# Altium PCB PCB1.PcbDoc
Units mm, origin at the board's own origin, x right, y up, seen from the top; angles counter-clockwise.
Board outline 37.85 x 29.59 mm, 2 copper layers (Top Layer, Bottom Layer); 22 components, 22 nets, 111 pads, 0 vias.
Unrouted connection lines stored in the file: 49.
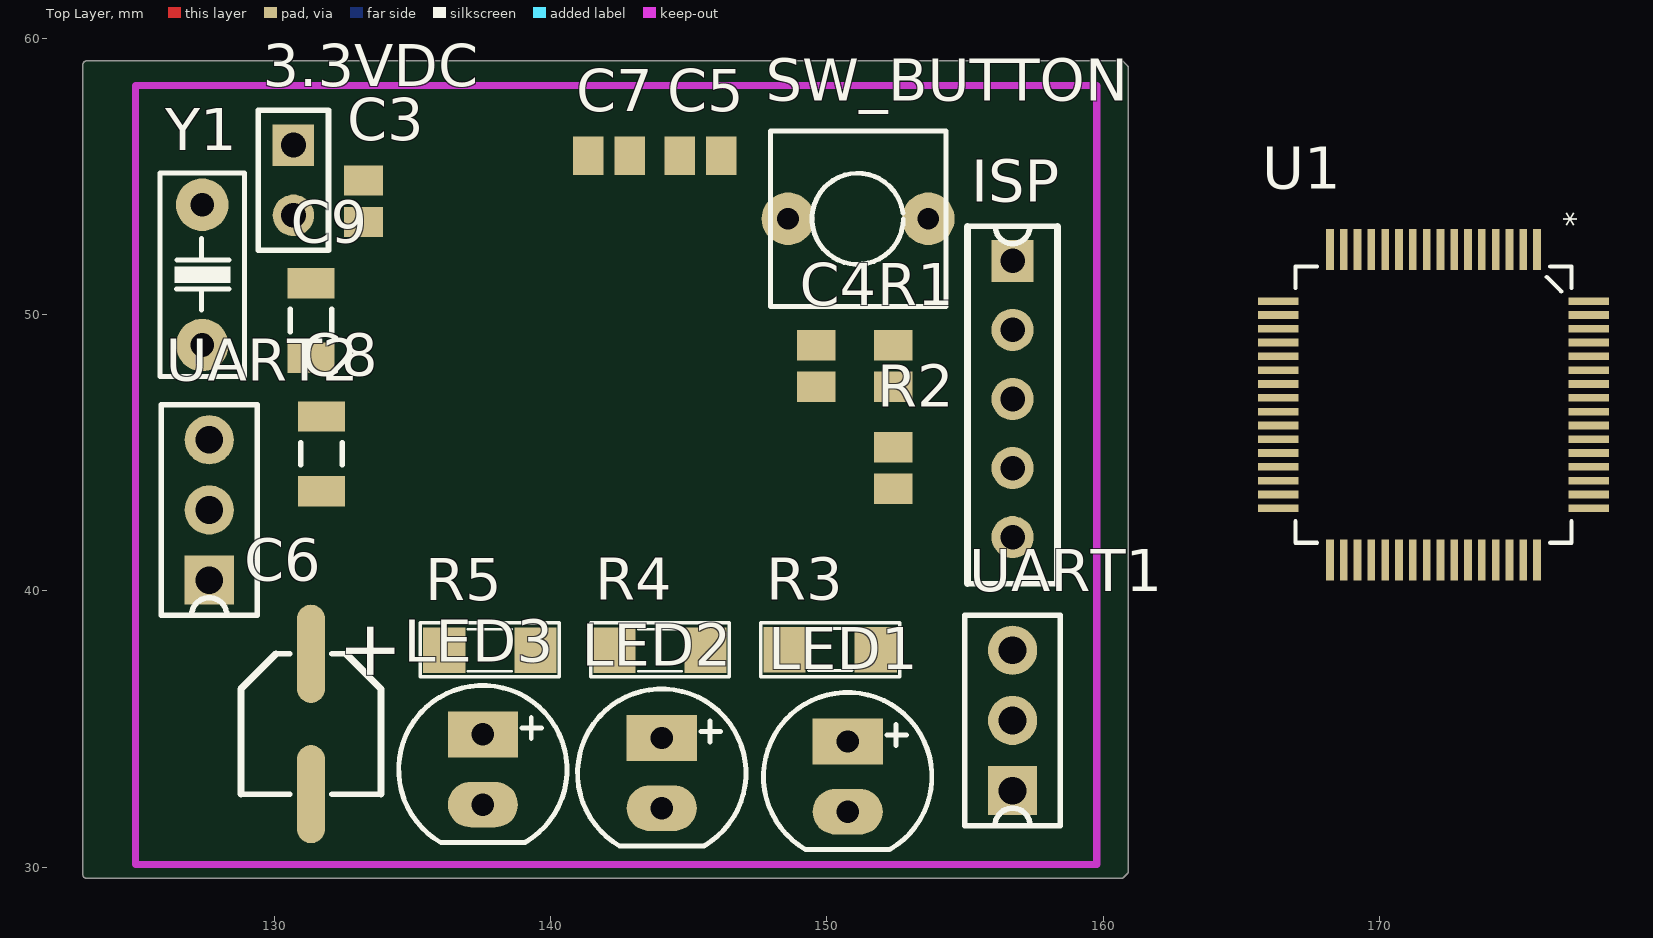
[diagram p0: Top Layer view]
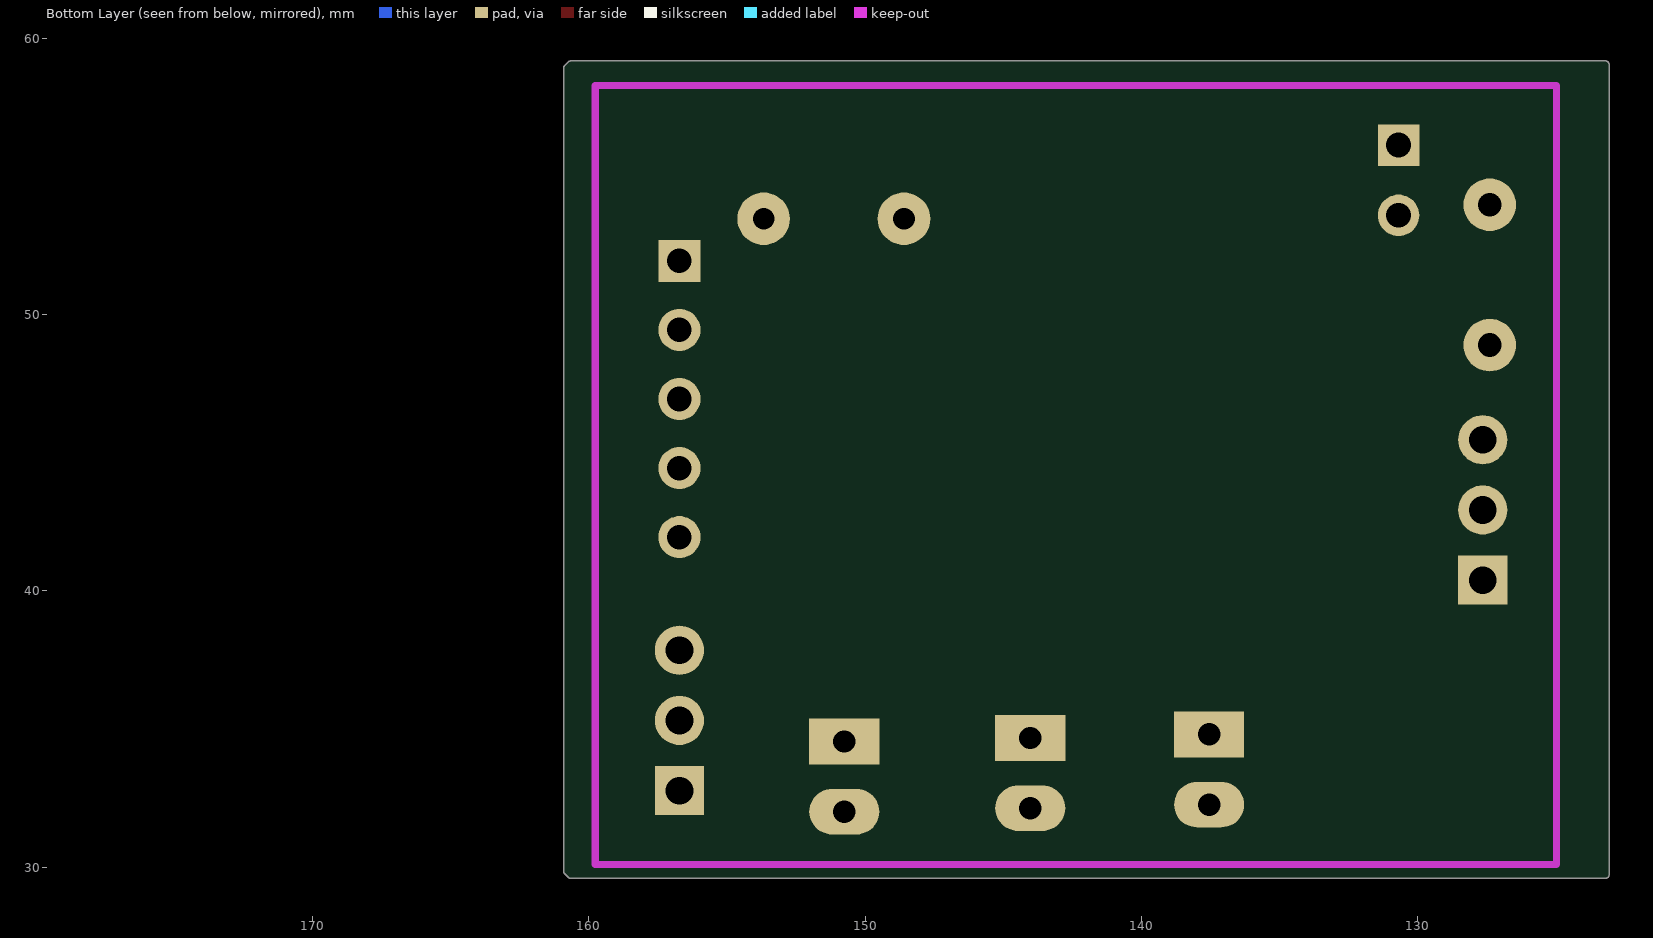
[diagram p1: Bottom Layer view, seen from below]

## Layer stack, top to bottom
Top Layer: signal copper 0.0356
Dielectric: core 0.32, FR-4, Dk 4.8
Bottom Layer: signal copper 0.0356

## Board outline
123.063,29.718 ccw(c123.19,29.718) 123.19,29.591 160.655,29.591 ccw(c160.655,29.718) 160.746,29.628 160.745,29.628 160.872,29.755 160.872,29.754 ccw(c160.782,29.845) 160.909,29.845 160.909,58.928 ccw(c160.782,58.928) 160.872,59.019 160.872,59.018 160.745,59.145 160.746,59.145 ccw(c160.655,59.055) 160.655,59.182 123.19,59.182 ccw(c123.19,59.055) 123.063,59.055

## Design rules (kind name [scope] priority, off if disabled: settings)
Clearance 3.3VCC [InNet('3.3VDC')] p1: gap=0.762
Clearance [All] p2: gap=0.508
PolygonConnect [All] p1: connectstyle=Relief reliefconductorwidth=0.254 reliefentries=4 polygonreliefangle="90 Angle"
RoomDefinition Sheet1 [InComponentClass('Sheet1')] p1: confinementstyle=ConfineIn formatcopy=TRUE lockcomponents=FALSE outline 178.943,26.924 229.87,26.924 229.87,35.052 178.943,35.052
RoutingVias [All] p1: holewidth=0.711 width=1.27 viastyle="Through Hole" minholewidth=0.711 minwidth=1.27 maxholewidth=0.711 maxwidth=1.27
SilkscreenOverComponentPads [All] p1: minsilkscreentomaskgap=0.254
SolderMaskExpansion [All] p1: expansion=0.102
Width L3.3VCC [InNet('3.3VDC')] p1: maxlimit=1.016 minlimit=0.203 preferedwidth=0.762
Width [All] p2: maxlimit=0.508 minlimit=0.203 preferedwidth=0.381
27 further rules are at their usual default settings.

## Components (designator, comment, footprint, x,y, rotation, side; value= is the part's Value field where it differs from the comment)
3.3VDC "Header 2" HDR1X2 130.683,56.134 r270 top
C3 "Cap" C0805 133.223,54.102 r90 top
C4 "Cap" C0805 149.606,48.133 r90 top
C5 "Cap" C0805 145.415,55.753 r0 top
C6 "Cap2" "CAP 1uF SMD" 131.318,35.179 r270 top
C7 "Cap" C0805 142.113,55.753 r0 top
C8 "Cap" C1206 131.699,44.958 r90 top
C9 "Cap" C1206 131.318,49.784 r270 top
ISP "JP5" CON5 156.718,51.943 r0 top
LED1 "LED" "LED-5 GRe" 150.749,34.544 r270 top
LED2 "LED" "LED-5 GRe" 144.018,34.671 r270 top
LED3 "LED" "LED-5 GRe" 137.541,34.798 r270 top
R1 "Res1" C0805 152.4,48.133 r270 top
R2 "res" C0805 152.4,44.45 r270 top
R3 "220" SM-1206 150.114,37.871 r180 top
R4 "220" SM-1206 143.954,37.846 r0 top
R5 "220" SM-1206 137.795,37.846 r0 top
SW_BUTTON "SW" SW2 148.59,53.467 r0 top
U1 "PIC24FJ128GA306" TQFP64_10X10MC 171.958,46.736 r270 top
UART1 "JP3" CON3 156.718,32.766 r180 top
UART2 "JP3" CON3 127.635,40.386 r180 top
Y1 "XTAL" XT455k 127.381,51.435 r270 top

## Footprints (in the part's own frame and the unit in brackets; to place one, negate y for a bottom-side part, rotate by r counter-clockwise, add the part's x,y. Pads: shape width x height; smd on the part's side, far side on the other; paste and mask are expansions set on the pad)
C0805 [mm] "Chip Capacitor, Body 2.0x1.3mm, IPC High Density"
  rect 1.1x1.4 smd: 1(-0.75,0) 2(0.75,0)
  body extent -1.1,-0.72 1.1,0.72, height 1.4
C1206 [mm] "Chip Capacitor, Body 3.2x1.6mm, IPC High Density"
  rect 1.1x1.7 smd: 1(-1.35,0) 2(1.35,0)
  silkscreen extent -0.4,-0.75 0.4,0.75, body extent -1.7,-0.9 1.7,0.9, height 1.3
"CAP 1uF SMD" [mil] "TU SMD"
  oval 140x40 smd: 1(-100,0) 2(100,0)
  silkscreen extent -100,-100 100,100
CON3 [mil]
  rect 70x70 hole 39.37 unplated: 1(0,0)
  round 70 hole 39.37 unplated: 2(0,-100) 3(0,-200)
  silkscreen extent -68,-250 68,50
CON5 [mil]
  rect 60x60 hole 35: 1(0,0)
  round 60 hole 35: 2(0,-98.42) 3(0,-196.85) 4(0,-295.28) 5(0,-393.7)
  silkscreen extent -64,-460 64,49
HDR1X2 [mm] "Connector; Header; 2 Position"
  rect 1.5x1.5 hole 0.9: 1(0,0)
  round 1.5 hole 0.9: 2(2.54,0)
  silkscreen extent -1.27,-1.27 3.81,1.27
"LED-5 GRe" [mil] "LED 2 PIN, 5 ly , Only colour,pin to pin 100mil"
  rect 65x100 hole 32: 1(0,0)
  oval 65x100 hole 32: 2(100,0)
  silkscreen extent -70,-120 154,120, body extent -54,-104 154,105, height 337
SM-1206 [mil] "Compoment SMD 120x60mil"
  rect 60x65 smd: 1(-65,0) 2(65,0)
  silkscreen extent -99,-38 99,39, body extent -83,-35 83,36, height 25
SW2 [mil] "SW button 2pin, 250x 250 mil"
  round 75 hole 31: 1(0,0) 2(200,0)
  silkscreen extent -25,-125 225,125
TQFP64_10X10MC [mil]
  rect 58x11 smd: 1(-221.22,147.64) 2(-221.22,127.95) 3(-221.22,108.27) 4(-221.22,88.58) 5(-221.22,68.9) 6(-221.22,49.21) 7(-221.22,29.53) 8(-221.22,9.84) 9(-221.22,-9.84) 10(-221.22,-29.53) 11(-221.22,-49.21) 12(-221.22,-68.9) 13(-221.22,-88.58) 14(-221.22,-108.27) 15(-221.22,-127.95) 16(-221.22,-147.64) 33(221.22,-147.64) 34(221.22,-127.95) 35(221.22,-108.27) 36(221.22,-88.58) 37(221.22,-68.9) 38(221.22,-49.21) 39(221.22,-29.53) 40(221.22,-9.84) 41(221.22,9.84) 42(221.22,29.53) 43(221.22,49.21) 44(221.22,68.9) 45(221.22,88.58) 46(221.22,108.27) 47(221.22,127.95) 48(221.22,147.64)
  rect 11x58 smd: 17(-147.64,-221.22) 18(-127.95,-221.22) 19(-108.27,-221.22) 20(-88.58,-221.22) 21(-68.9,-221.22) 22(-49.21,-221.22) 23(-29.53,-221.22) 24(-9.84,-221.22) 25(9.84,-221.22) 26(29.53,-221.22) 27(49.21,-221.22) 28(68.9,-221.22) 29(88.58,-221.22) 30(108.27,-221.22) 31(127.95,-221.22) 32(147.64,-221.22) 49(147.64,221.22) 50(127.95,221.22) 51(108.27,221.22) 52(88.58,221.22) 53(68.9,221.22) 54(49.21,221.22) 55(29.53,221.22) 56(9.84,221.22) 57(-9.84,221.22) 58(-29.53,221.22) 59(-49.21,221.22) 60(-68.9,221.22) 61(-88.58,221.22) 62(-108.27,221.22) 63(-127.95,221.22) 64(-147.64,221.22)
  silkscreen extent -197,-197 197,197
XT455k [mil] "Thach anh 455khz (Infrared)"
  round 75 hole 34: 1(-100,0) 2(100,0)
  silkscreen extent -145,-60 145,60

## Part data
3.3VDC: "Header, 2-Pin"
C3 C4 C5 C6 C7 C8 C9: "Capacitor"
ISP: library part Con5, "Connector 5"
LED1 LED2 LED3: "LED Single colour Green and Red"
R1: "Resistor"
R2: library part Res1, "Resistor"
R3 R4 R5: library part R, "Resistor 1/4W"
SW_BUTTON: library part SW2, "Switch button 2 pin"
UART1 UART2: library part Con3, "Connector 3"
Y1: "Crystal Oscillator"

## Nets (pads, with @x,y where several pads share a name; then routed paths per layer and width w, separated by ;. In a path a pad name is that pad's centre, name@x,y a point inside that pad or via, vN(x,y) a via of type N, cw(c..) or ccw(c..) an arc to the next point about the centre after c; other vN are vias at no path point)
3.3VDC: 3.3VDC.1 C3.1 C4.2 C5.1 C7.1 ISP.4 R1.2 U1.10 U1.19 U1.26 U1.38
5VDC: 
AN8: U1.21
GND: 3.3VDC.2 C3.2 C4.1 C5.2 C6.2 C7.2 C8.1 C9.1 ISP.3 LED1.2 LED2.2 LED3.2 SW_BUTTON.1 U1.9 U1.20 U1.25 U1.41 UART1.1 UART2.1
LED1: R3.2 U1.64
LED2: R4.2 U1.63
LED3: R5.2 U1.62
NetC6_1: C6.1 U1.56
NetLED1_1: LED1.1 R3.1
NetLED2_1: LED2.1 R4.1
NetLED3_1: LED3.1 R5.1
NetR1_1: R1.1 R2.1 SW_BUTTON.2
OSCI: C9.2 U1.39 Y1.1
OSCO: C8.2 U1.40 Y1.2
PGC: ISP.1 U1.15
PGD: ISP.2 U1.16
RB10: U1.23
U1RX_RP22: U1.51 UART1.2
U1TX_RP25: U1.52 UART1.3
U2RX_RP24: U1.49 UART2.2
U2TX_RP23: U1.50 UART2.3
VPP: ISP.5 R2.2 U1.7
pads on no net: U1.1 U1.2 U1.3 U1.4 U1.5 U1.6 U1.8 U1.11 U1.12 U1.13 U1.14 U1.17 U1.18 U1.22 U1.24 U1.27 U1.28 U1.29 U1.30 U1.31 U1.32 U1.33 U1.34 U1.35 U1.36 U1.37 U1.42 U1.43 U1.44 U1.45 U1.46 U1.47 U1.48 U1.53 U1.54 U1.55 U1.57 U1.58 U1.59 U1.60 U1.61

## Keep-outs
Keep-Out Layer:
  lines w0.254: 124.968,30.099 124.968,58.293 ; 124.968,30.099 124.968,58.293 ; 124.968,30.099 159.004,30.099 159.258,30.099 159.766,30.099 159.766,57.404 159.766,58.293 124.968,58.293

## Text inside footprints (layer, text, board x,y; h text height)
C6: Top Overlay "+" at 132.588,38.989 h2.03 r270
U1: Top Overlay "*" at 176.339,53.727 h0.79 r270; Mechanical 1 "*" at 176.339,53.727 h0.79 r270